# Altium PCB USB-C_BREAKOUT_PCB ASCII REV Project_PCB_Rev.Project_SCH_Rev.PcbDoc
Units mm, origin at the board's own origin, x right, y up, seen from the top; angles counter-clockwise.
Board outline 51.96 x 35 mm, 8 copper layers (Top, GND_1, Signal_1, GND_2, PWR, Signal_2, GND_3, Bottom), stack 1.6 mm thick; 18 components, 16 nets, 86 pads, 70 vias.
Unrouted connection lines stored in the file: 105.
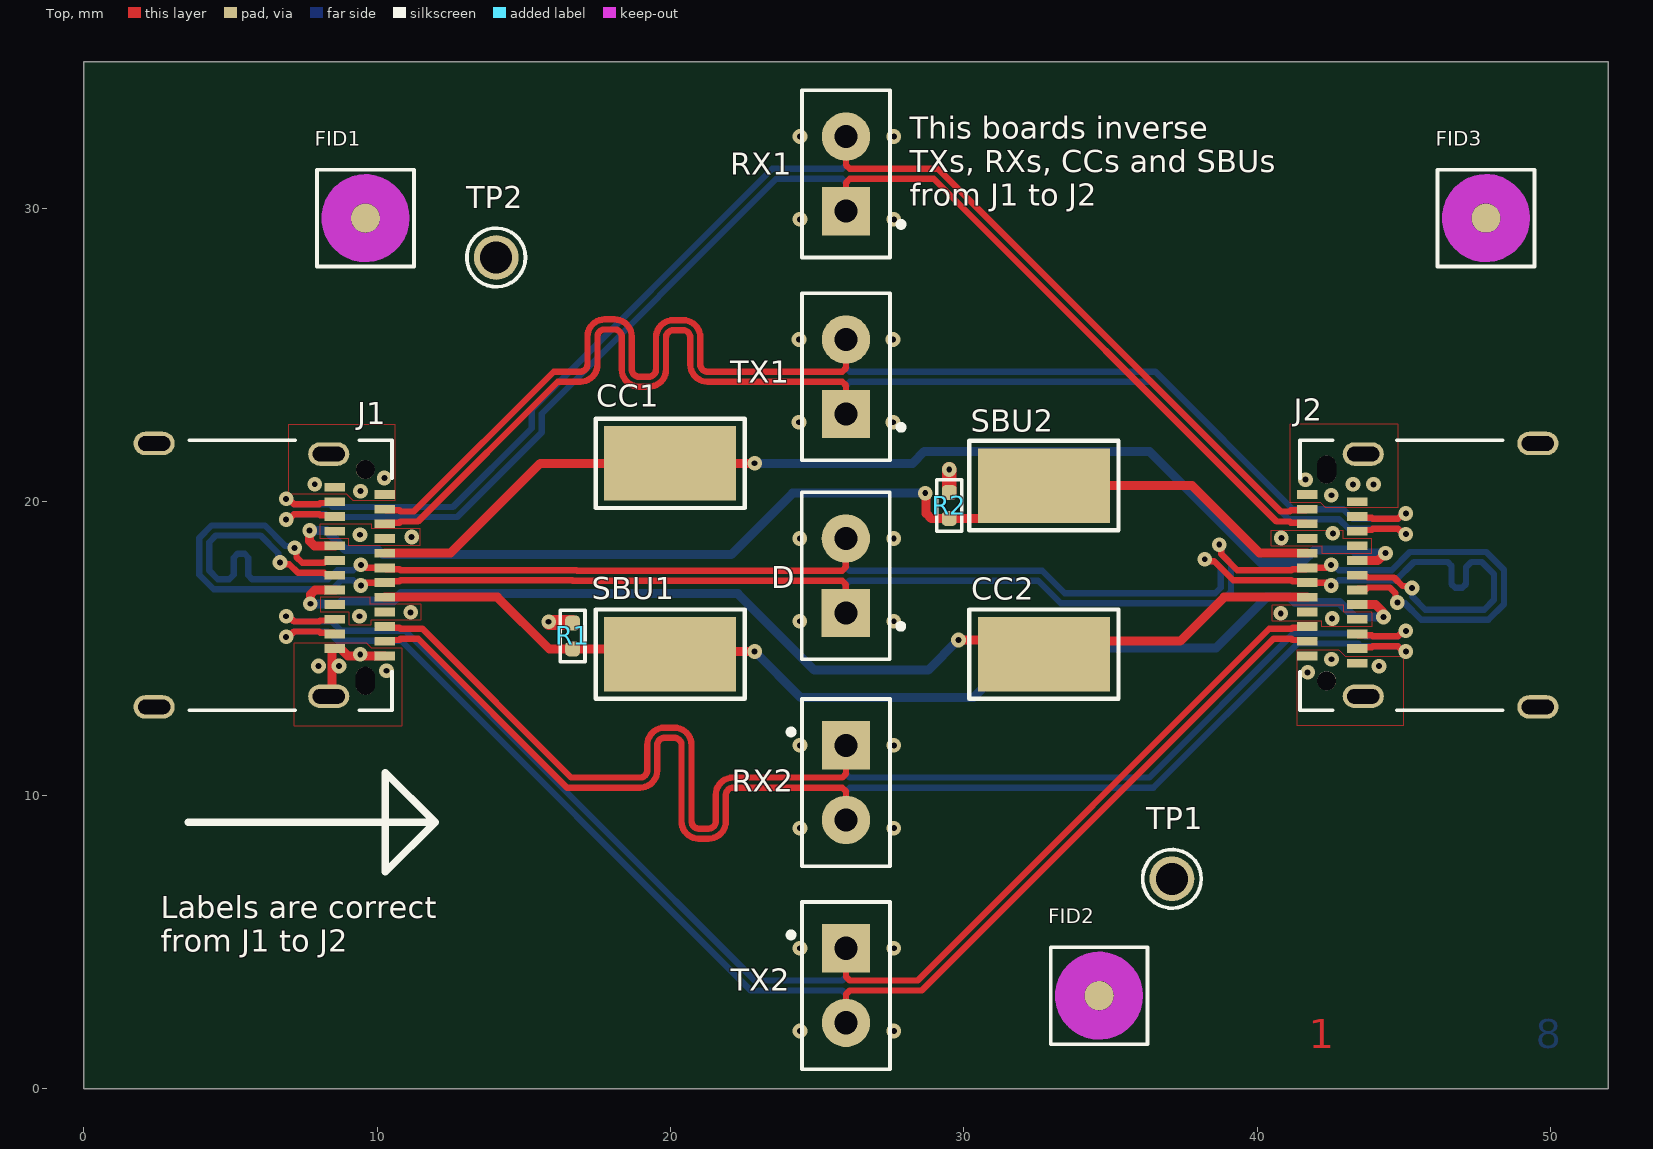
[diagram p0: Top view]
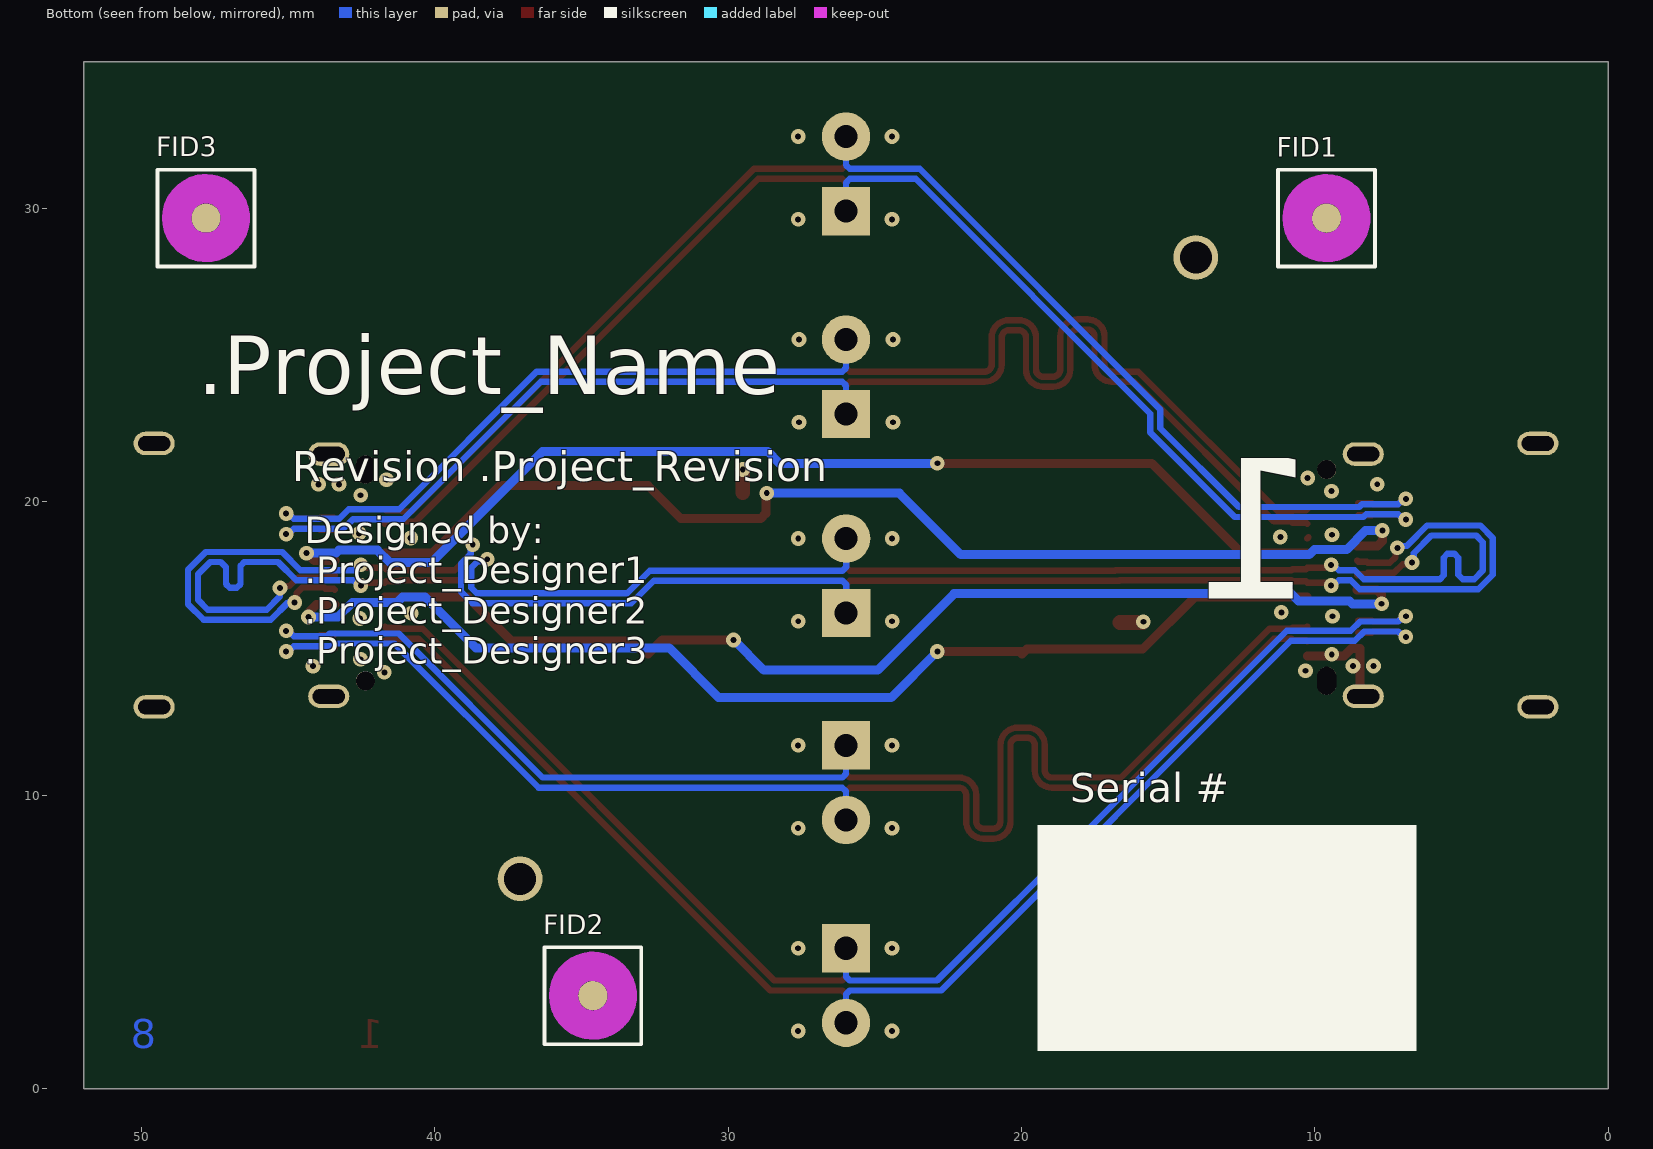
[diagram p1: Bottom view, seen from below]
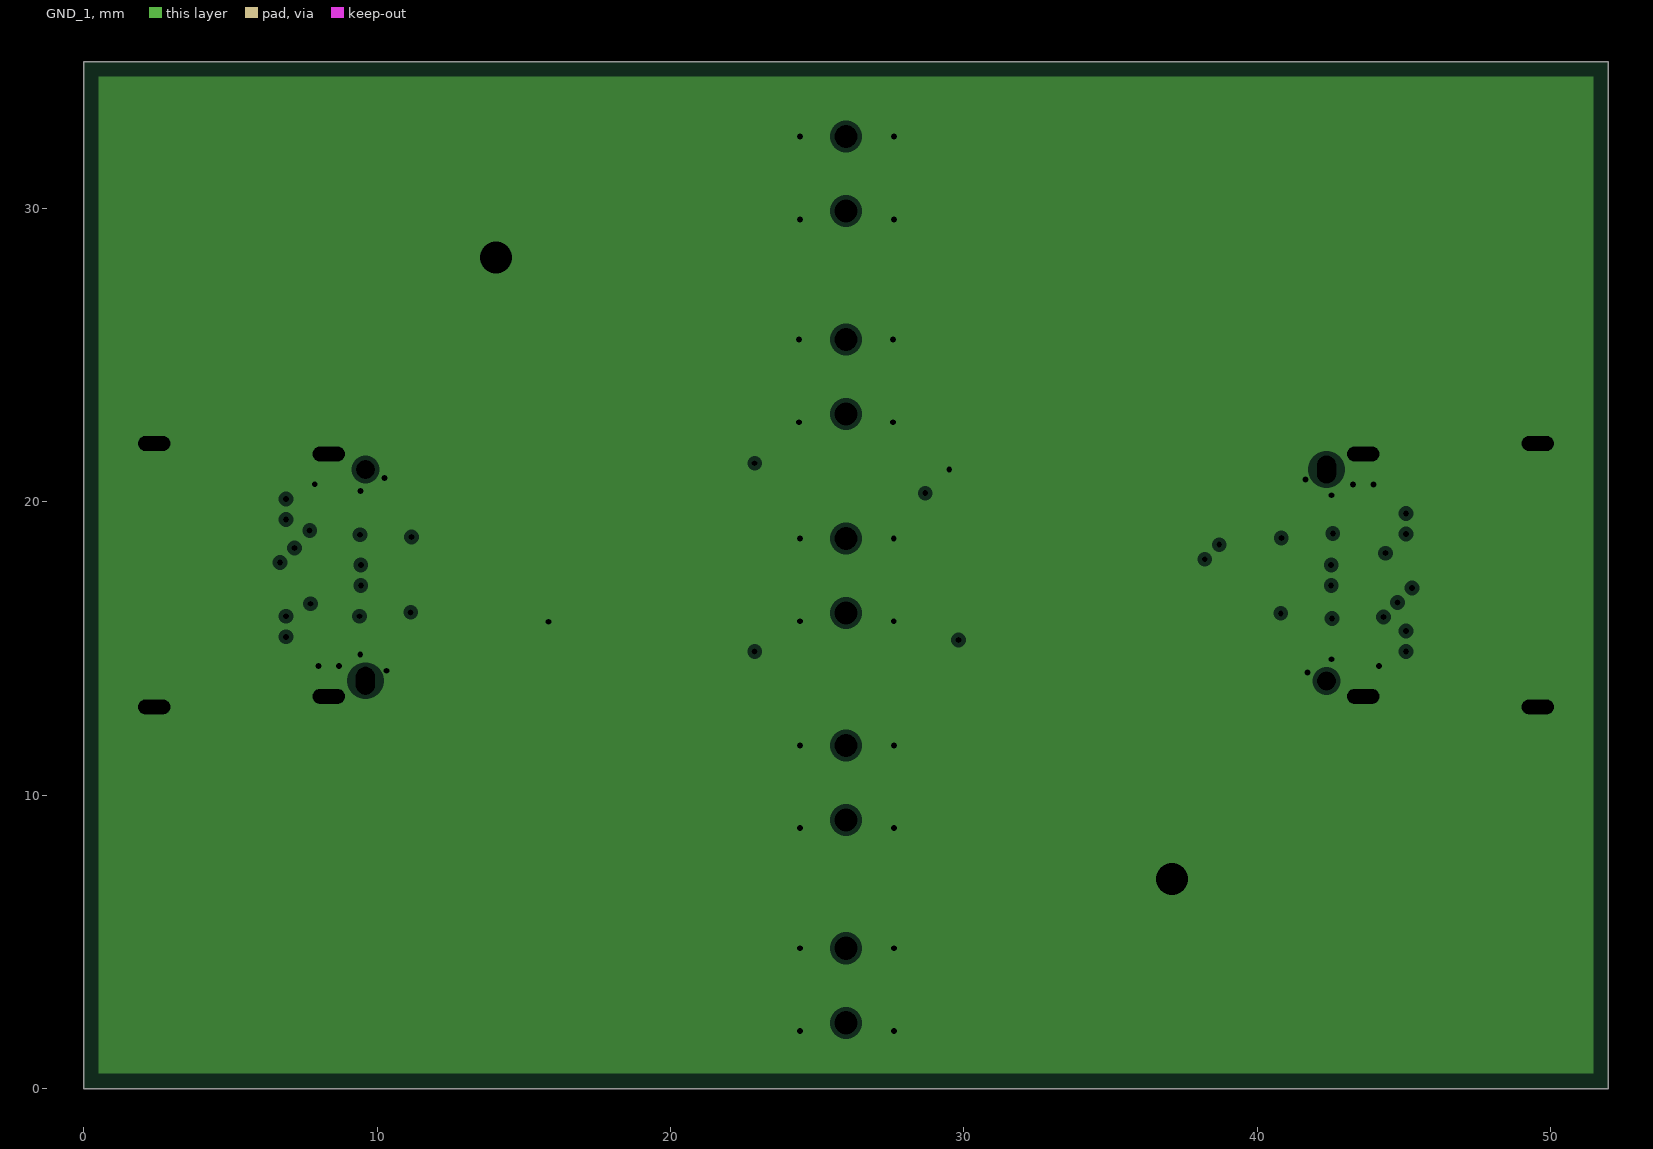
[diagram p2: GND_1, clearances drawn from the general rule]
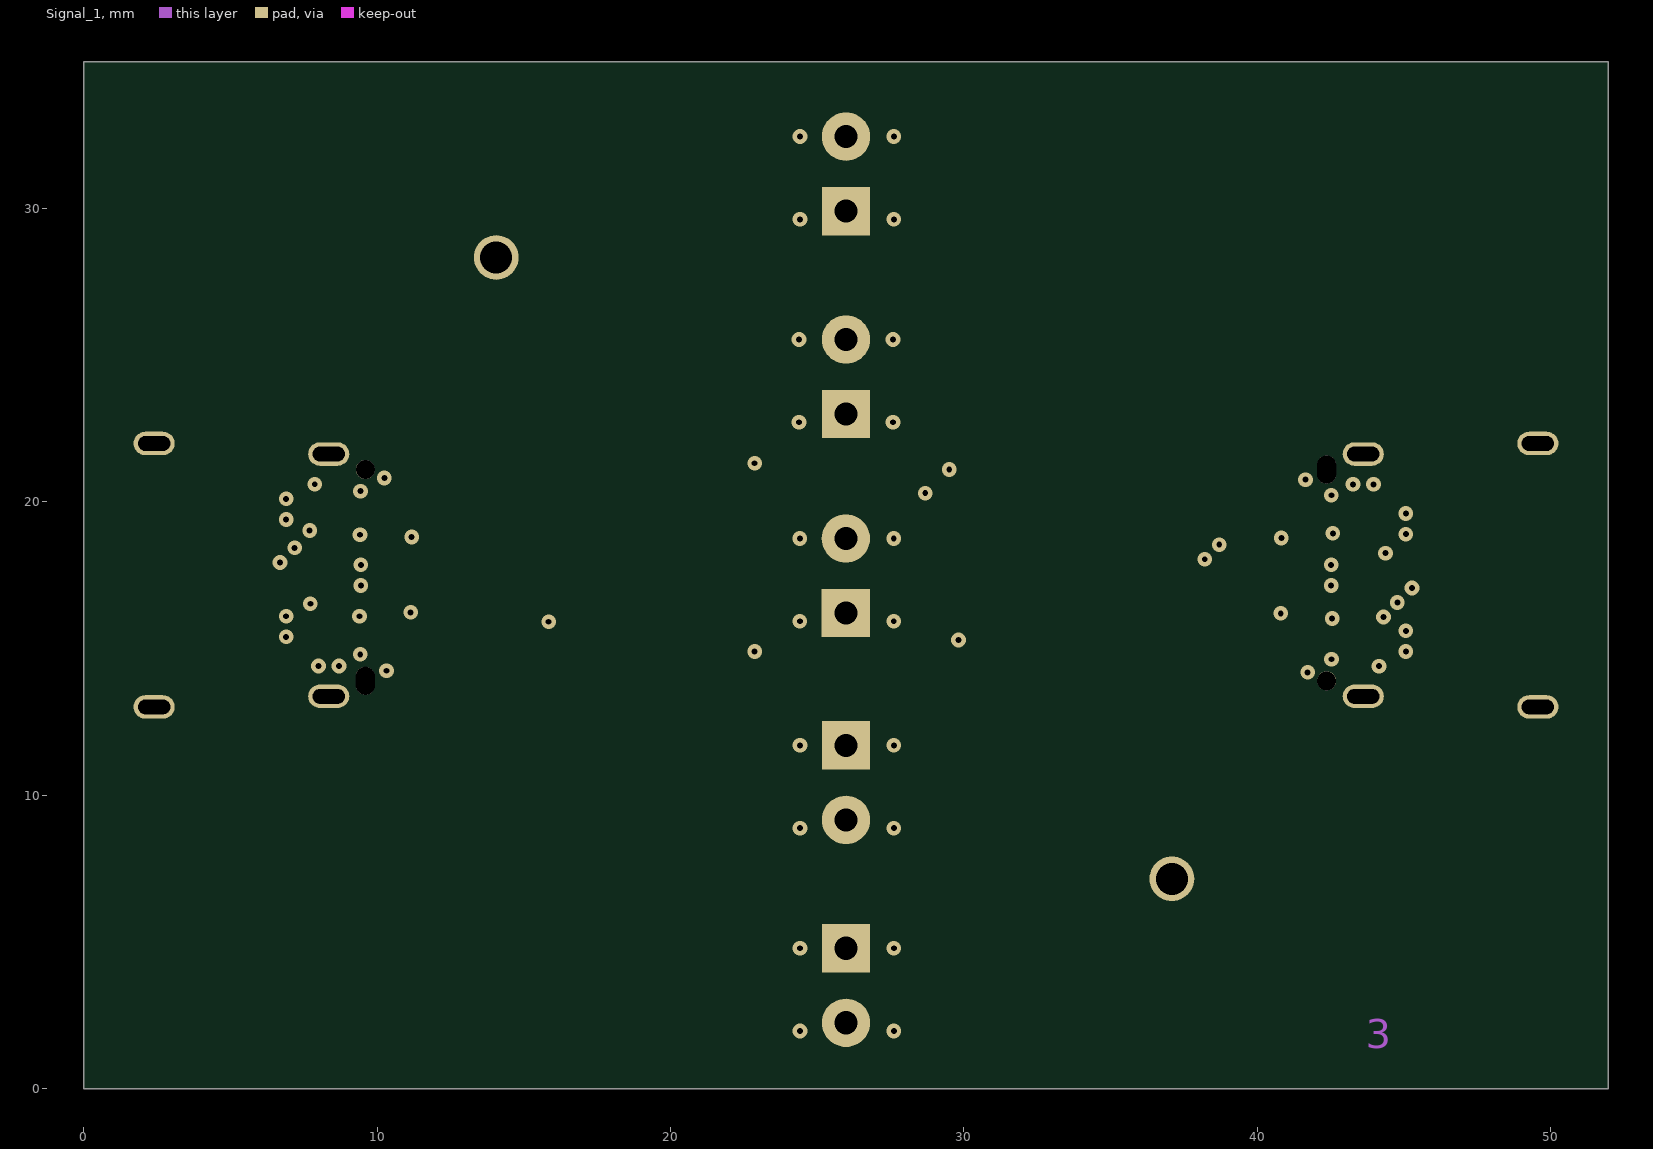
[diagram p3: Signal_1]
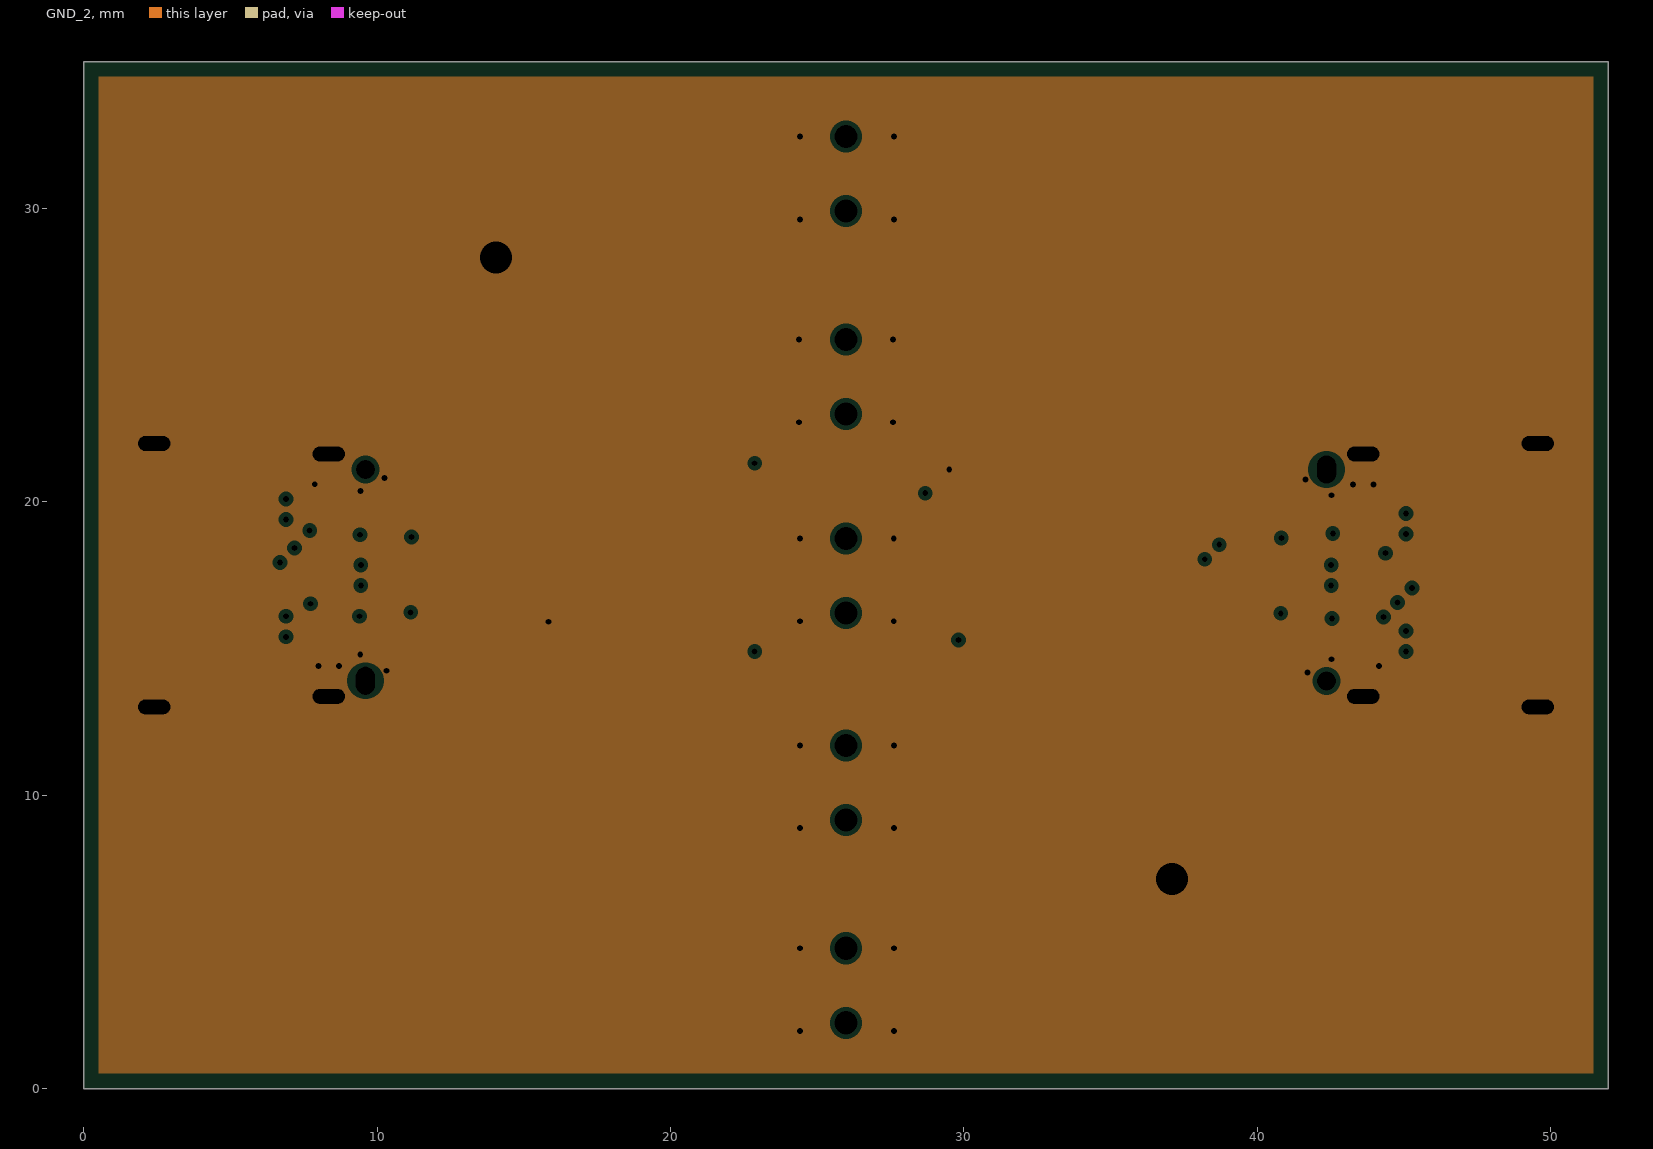
[diagram p4: GND_2, clearances drawn from the general rule]
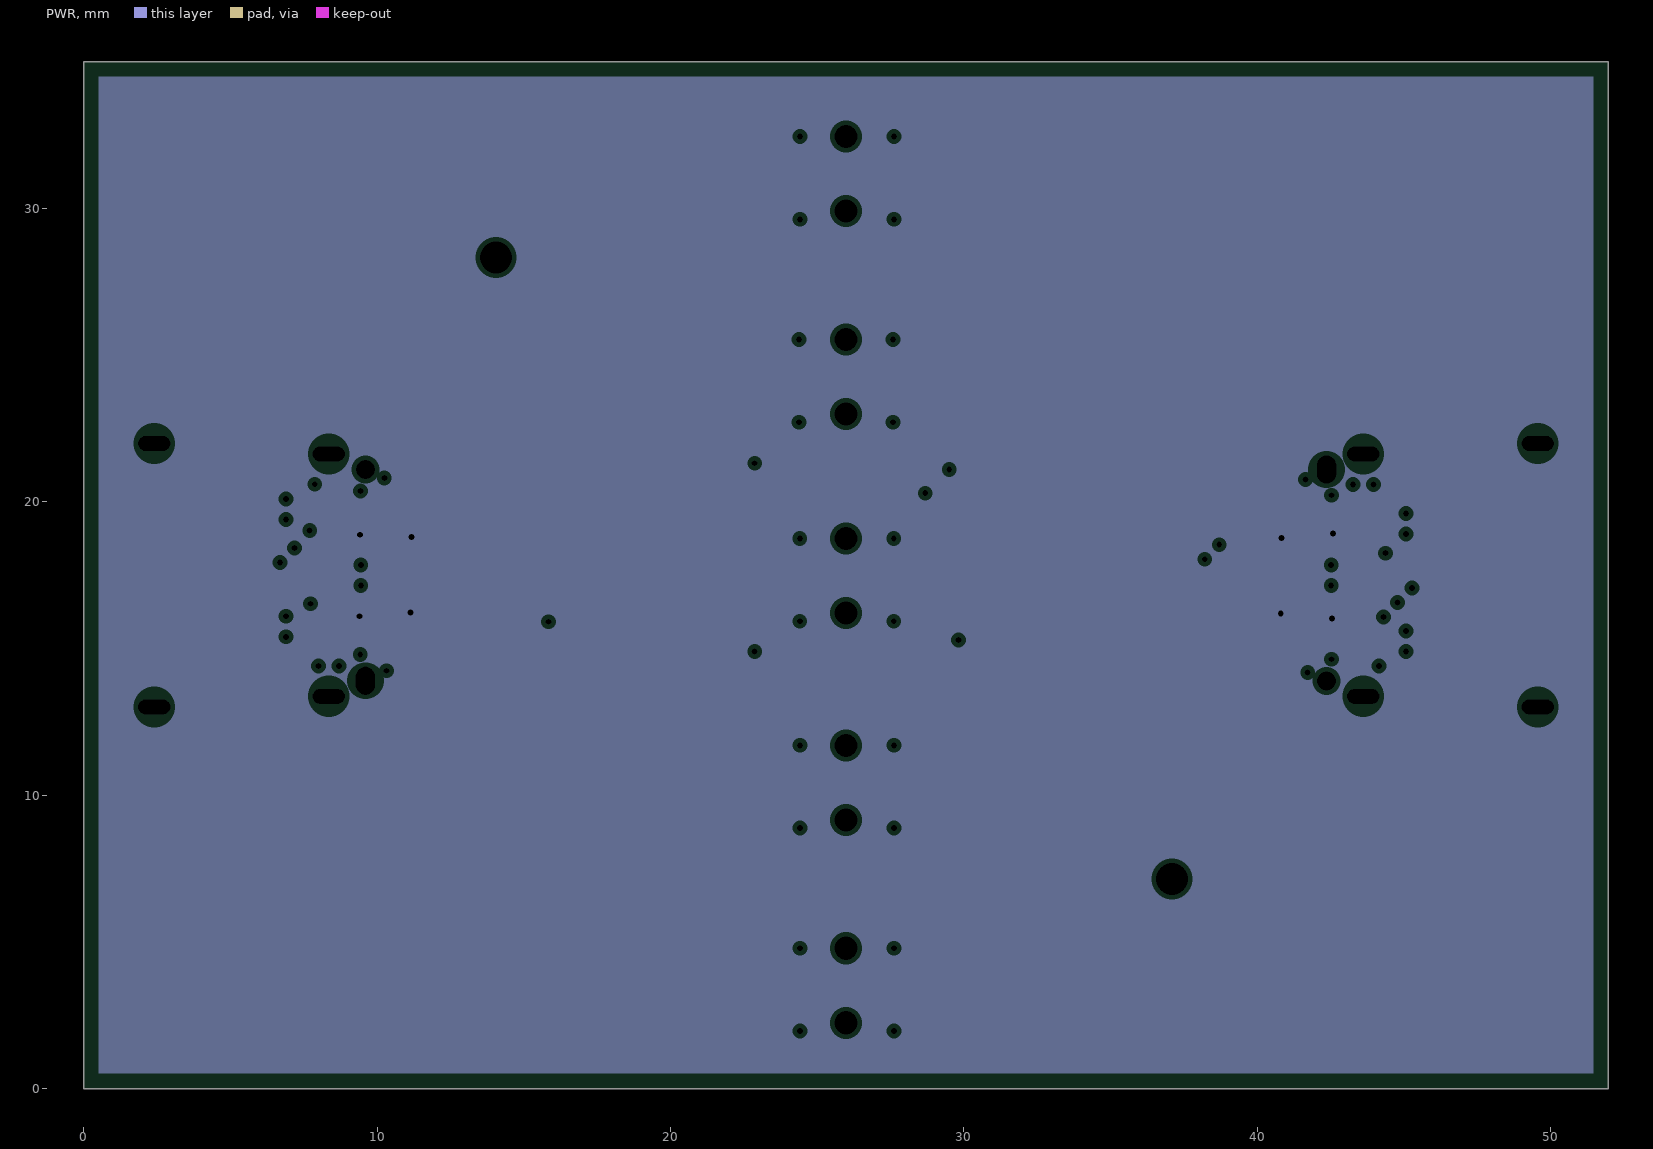
[diagram p5: PWR, clearances drawn from the general rule]
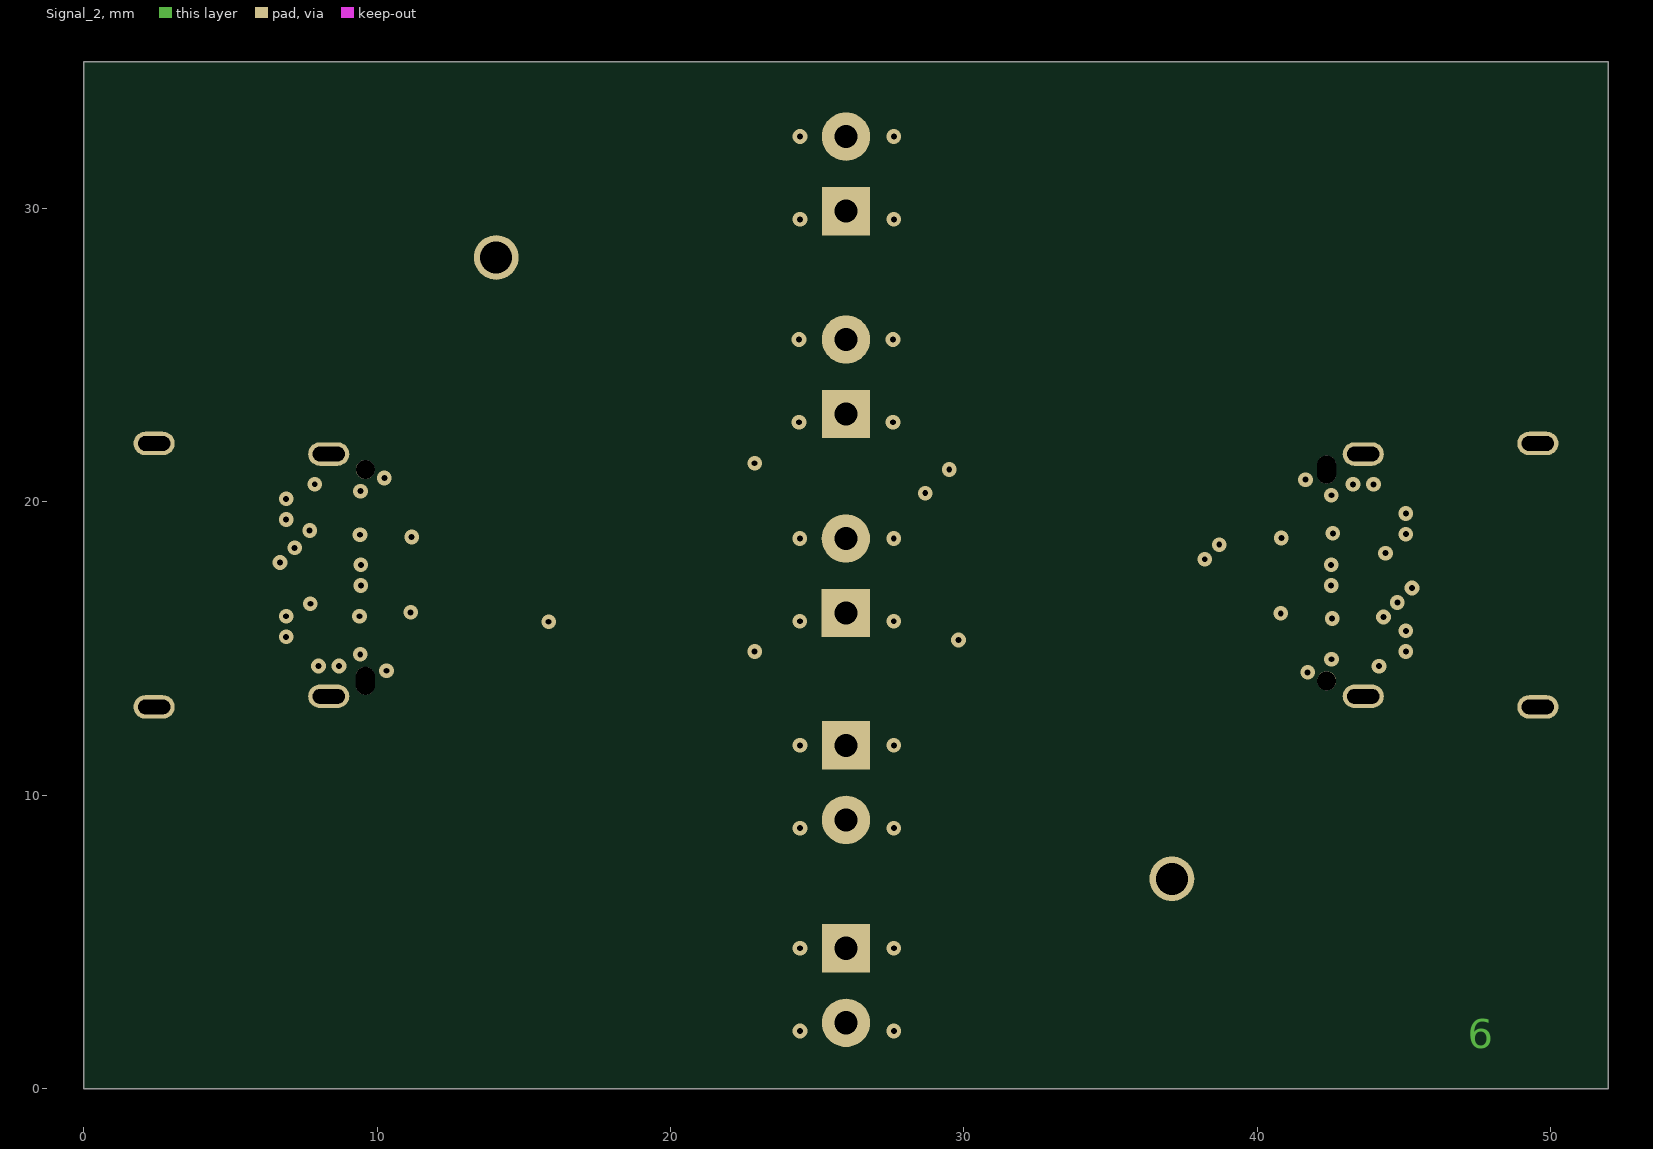
[diagram p6: Signal_2]
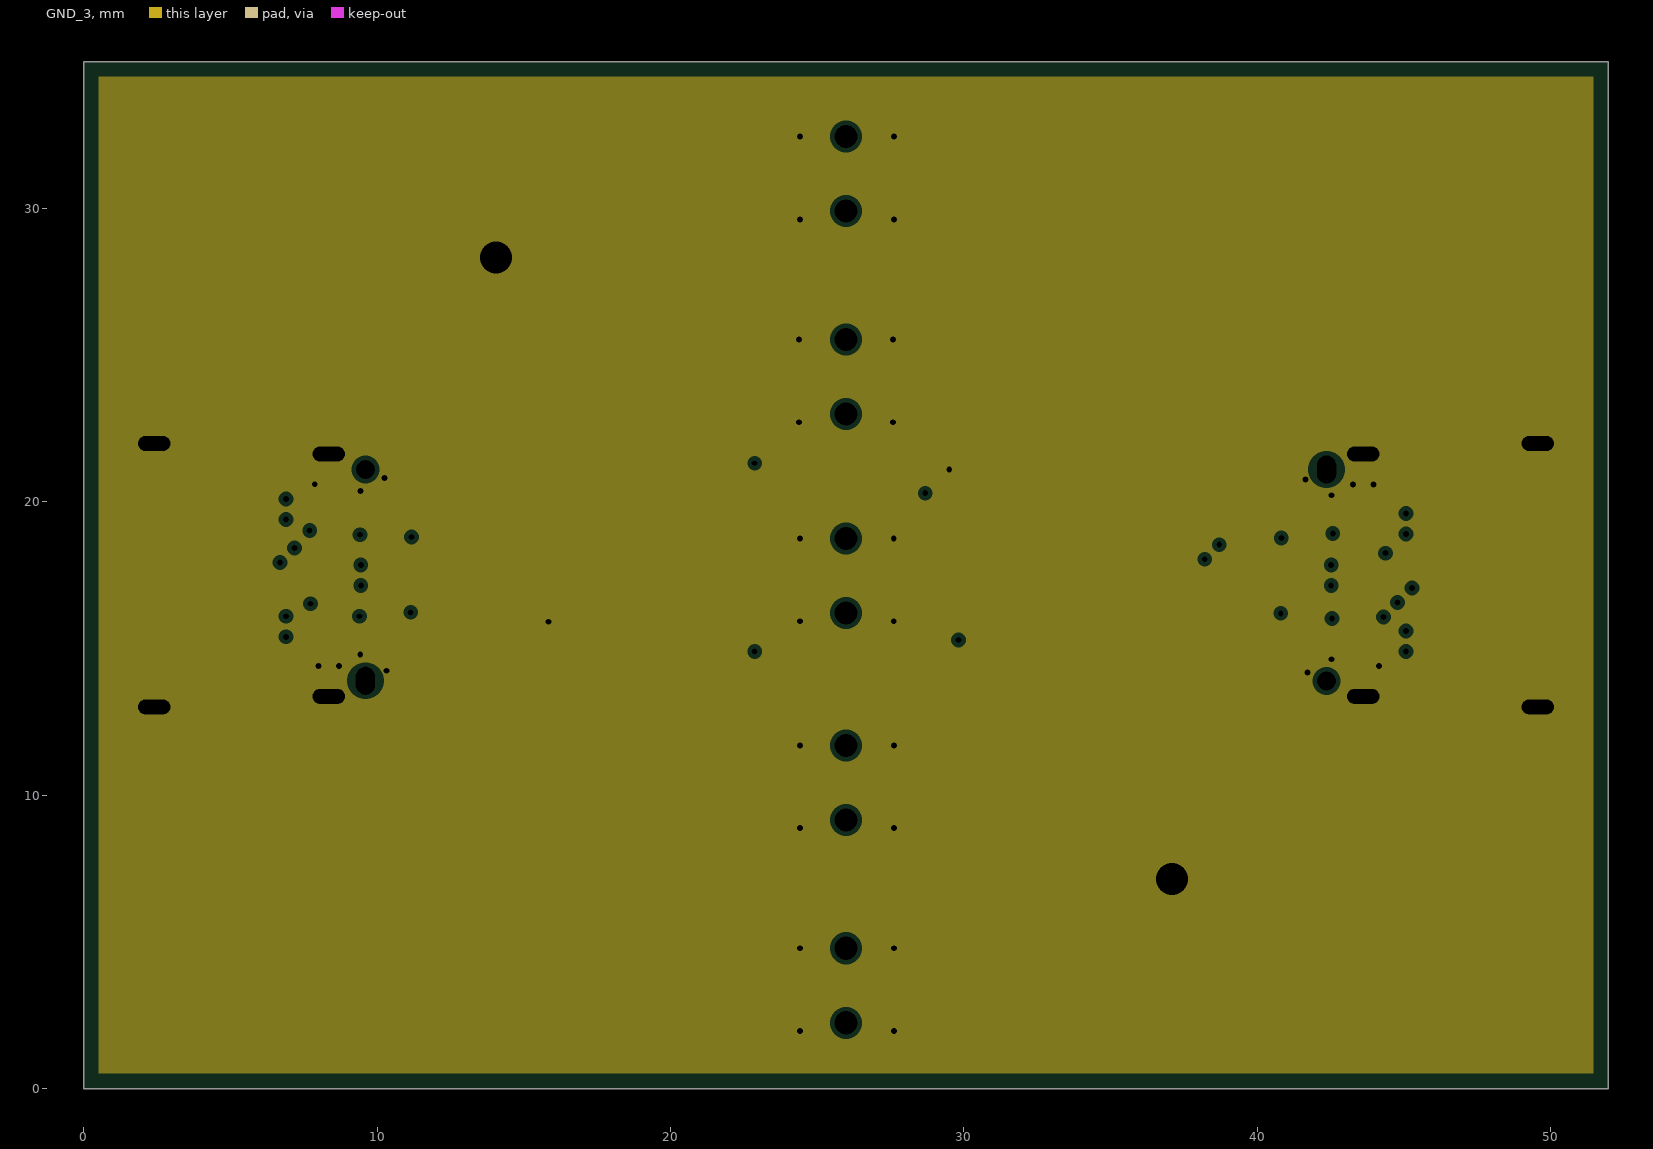
[diagram p7: GND_3, clearances drawn from the general rule]

## Layer stack, top to bottom
Top Solder: solder mask 0.0254, Solder Resist, Dk 4
Top: signal copper 0.035
Dielectric 1: prepreg 0.18, PP-006, Dk 4.29
GND_1: plane copper 0.035, net GND
Dielectric 2: core 0.2, Core-009, Dk 4.5
Signal_1: signal copper 0.035
Dielectric 3: prepreg 0.18, PP-006, Dk 4.29
GND_2: plane copper 0.035, net GND
Dielectric 4: core 0.2, Core-009, Dk 4.5
PWR: plane copper 0.035, net VBUS
Dielectric 5: prepreg 0.18, PP-006, Dk 4.29
Signal_2: signal copper 0.035
Dielectric 6: core 0.2, Core-009, Dk 4.5
GND_3: plane copper 0.035, net GND
Dielectric 7: prepreg 0.18, PP-006, Dk 4.29
Bottom: signal copper 0.035
Bottom Solder: solder mask 0.0152, Solder Resist, Dk 3.5

## Board outline
0,0 0,35 51.962,35 51.962,0

## Design rules (kind name [scope] priority, off if disabled: settings)
AssemblyTestPointUsage [All] p0: scope1count=1 scope1_0_kind=Board scope1_0_value=Board scope2count=1 scope2_0_kind=Board scope2_0_value=Board commentlength=0
AssemblyTestpoint [All] p0: scope1count=1 scope1_0_kind=Board scope1_0_value=Board scope2count=1 scope2_0_kind=Board scope2_0_value=Board commentlength=0
BoardOutlineClearance [All] p0: scope1count=1 scope1_0_kind=Board scope1_0_value=Board scope2count=1 scope2_0_kind=Board scope2_0_value=Board commentlength=0 gap=0.305
BoardOutlineClearance BoardOutlineClearance-MouseBites [All] p0: scope1count=1 scope1_0_kind=ComponentClass scope1_0_value=MouseBites scope2count=1 scope2_0_kind=Board scope2_0_value=Board commentlength=0 gap=0.254
BoardOutlineClearance BoardOutlineClearance-Fiducials [All] p0: scope1count=1 scope1_0_kind=ComponentClass scope1_0_value=Fiducials scope2count=1 scope2_0_kind=Board scope2_0_value=Board commentlength=0 gap=0
BoardOutlineClearance BoardOutlineClearance-Silk [All] p0 off: scope1count=1 scope1_0_kind=Board scope1_0_value=Board scope2count=1 scope2_0_kind=Board scope2_0_value=Board commentlength=94 gap=0 // Protel DXP Scope 1 Expression Was: (OnLayer('Bottom Overlay')) OR (OnLayer('Top Overlay'))
BoardOutlineClearance BoardOutlineClearance-Silk [(OnLayer('Bottom Overlay')) OR (OnLayer('Top Overlay'))] p1: gap=0 ignorepadtopadclearanceinfootprint=FALSE
BoardOutlineClearance BoardOutlineClearance-Fiducials [InComponentClass('Fiducials')] p2: gap=0 ignorepadtopadclearanceinfootprint=FALSE
BoardOutlineClearance BoardOutlineClearance-MouseBites [InComponentClass('MouseBites')] p3: gap=0.254 ignorepadtopadclearanceinfootprint=FALSE except(0: Arc-SplitContinuation Track-SplitContinuation SMDPad-SplitContinuation THPad-OutlineEdge THPad-CavityEdge THPad-CutoutEdge THPad-SplitBarrior THPad-SplitContinuation Via-SplitContinuation Fill-SplitContinuation Poly-SplitContinuation Region-OutlineEdge Region-CavityEdge Region-CutoutEdge Region-SplitBarrior Region-SplitContinuation Text-SplitContinuation; 0.508: Arc-OutlineEdge Track-OutlineEdge SMDPad-OutlineEdge Via-OutlineEdge Fill-OutlineEdge Poly-OutlineEdge Text-OutlineEdge)
BoardOutlineClearance [All] p4: gap=0.305 ignorepadtopadclearanceinfootprint=FALSE
Clearance Clearance_GEN [All] p0: scope1count=1 scope1_0_kind=Board scope1_0_value=Board scope2count=1 scope2_0_kind=Board scope2_0_value=Board commentlength=0 gap=0.102
Clearance Clearance_VIA [All] p0 off: scope1count=1 scope1_0_kind=Board scope1_0_value=Board scope2count=1 scope2_0_kind=Board scope2_0_value=Board commentlength=65 gap=0.31 // Protel DXP Scope 2 Expression Was: IsVia AND (InAnyComponent)
Clearance Clearance_VIA_SAME [All] p0 off: scope1count=1 scope1_0_kind=Board scope1_0_value=Board scope2count=1 scope2_0_kind=Board scope2_0_value=Board commentlength=69 gap=0.132 // Protel DXP Scope 2 Expression Was: IsVia and (NOT InAnyComponent)
Clearance Clearance_HOLE_2_PAD [All] p0 off: scope1count=1 scope1_0_kind=Board scope1_0_value=Board scope2count=1 scope2_0_kind=Board scope2_0_value=Board commentlength=70 gap=0 // Protel DXP Scope 2 Expression Was: IsSMTPin Or IsThruPin  or IsVia
Clearance Clearance_HOLE_2_PAD [IsVia and (NOT InAnyComponent) vs IsSMTPin Or IsThruPin  or IsVia] p1: gap=0 ignorepadtopadclearanceinfootprint=FALSE except(0.051: SMDPad-Via THPad-Via; 0.152: Via-Via)
Clearance Clearance_VIA_SAME [IsVia and (NOT InAnyComponent) vs IsVia and (NOT InAnyComponent)] p2: gap=0.132 ignorepadtopadclearanceinfootprint=FALSE
Clearance Clearance_VIA [IsVia AND (InAnyComponent) vs IsVia AND (InAnyComponent)] p3: gap=0.31 ignorepadtopadclearanceinfootprint=FALSE
Clearance Clearance_GEN [All] p4: gap=0.102 ignorepadtopadclearanceinfootprint=FALSE
ComponentClearance "Schematic Component Clearance Constraint_3" [All] p0: scope1count=1 scope1_0_kind=Component scope1_0_value=MB3 scope2count=1 scope2_0_kind=Board scope2_0_value=Board commentlength=0 gap=0 collisioncheckmode=3
ComponentClearance "Schematic Component Clearance Constraint_2" [All] p0: scope1count=1 scope1_0_kind=Component scope1_0_value=MB1 scope2count=1 scope2_0_kind=Board scope2_0_value=Board commentlength=0 gap=0 collisioncheckmode=3
ComponentClearance "Schematic Component Clearance Constraint_1" [All] p0: scope1count=1 scope1_0_kind=Component scope1_0_value=MB4 scope2count=1 scope2_0_kind=Board scope2_0_value=Board commentlength=0 gap=0 collisioncheckmode=3
ComponentClearance "Schematic Component Clearance Constraint" [All] p0: scope1count=1 scope1_0_kind=Component scope1_0_value=MB2 scope2count=1 scope2_0_kind=Board scope2_0_value=Board commentlength=0 gap=0 collisioncheckmode=3
ComponentClearance [All] p0: scope1count=1 scope1_0_kind=Board scope1_0_value=Board scope2count=1 scope2_0_kind=Board scope2_0_value=Board commentlength=0 gap=0.102 collisioncheckmode=3
ComponentClearance "Schematic Component Clearance Constraint_3" [InComponent('MB3')] p1: gap=0 collisioncheckmode=3 verticalgap=0 showdistances=FALSE
ComponentClearance "Schematic Component Clearance Constraint_2" [InComponent('MB1')] p2: gap=0 collisioncheckmode=3 verticalgap=0 showdistances=FALSE
ComponentClearance "Schematic Component Clearance Constraint_1" [InComponent('MB4')] p3: gap=0 collisioncheckmode=3 verticalgap=0 showdistances=FALSE
ComponentClearance "Schematic Component Clearance Constraint" [InComponent('MB2')] p4: gap=0 collisioncheckmode=3 verticalgap=0 showdistances=FALSE
ComponentClearance [All] p5: gap=0.102 collisioncheckmode=3 verticalgap=0.102 showdistances=FALSE
DiffPairsRouting DIFF_85_OHM [All] p0 off: scope1count=1 scope1_0_kind=Board scope1_0_value=Board scope2count=1 scope2_0_kind=Board scope2_0_value=Board commentlength=73 // Protel DXP Scope 1 Expression Was: InDifferentialPairClass('DIFF_85')
DiffPairsRouting DIFF_90_OHM [All] p0 off: scope1count=1 scope1_0_kind=Board scope1_0_value=Board scope2count=1 scope2_0_kind=Board scope2_0_value=Board commentlength=73 // Protel DXP Scope 1 Expression Was: InDifferentialPairClass('DIFF_90')
DiffPairsRouting DIFF_100_OHM [All] p0 off: scope1count=1 scope1_0_kind=Board scope1_0_value=Board scope2count=1 scope2_0_kind=Board scope2_0_value=Board commentlength=74 // Protel DXP Scope 1 Expression Was: InDifferentialPairClass('DIFF_100')
DiffPairsRouting DIFF_100_OHM [InDifferentialPairClass('DIFF_100')] p1: maxlimit=0.203 minlimit=0.127 mostfreqgap=0.203 toplayer_maxgap=0.127 toplayer_prefgap=0.127 toplayer_minwidth=0.127 toplayer_maxwidth=0.127 toplayer_prefwidth=0.127 midlayer1_mingap=0.203 midlayer1_minwidth=0.102 midlayer1_maxwidth=0.102 midlayer1_prefwidth=0.102 midlayer2_mingap=0.203 midlayer2_minwidth=0.102 midlayer2_maxwidth=0.102 midlayer2_prefwidth=0.102 bottomlayer_maxgap=0.127 bottomlayer_prefgap=0.127 bottomlayer_minwidth=0.127 bottomlayer_maxwidth=0.127 bottomlayer_prefwidth=0.127 maxuncoupledlength=12.7
DiffPairsRouting DIFF_90_OHM [InDifferentialPairClass('DIFF_90')] p2: maxlimit=0.178 minlimit=0.127 mostfreqgap=0.178 toplayer_maxgap=0.127 toplayer_prefgap=0.127 toplayer_minwidth=0.191 toplayer_maxwidth=0.191 toplayer_prefwidth=0.191 midlayer1_mingap=0.178 midlayer1_minwidth=0.127 midlayer1_maxwidth=0.127 midlayer1_prefwidth=0.127 midlayer2_mingap=0.178 midlayer2_minwidth=0.127 midlayer2_maxwidth=0.127 midlayer2_prefwidth=0.127 bottomlayer_maxgap=0.127 bottomlayer_prefgap=0.127 bottomlayer_minwidth=0.191 bottomlayer_maxwidth=0.191 bottomlayer_prefwidth=0.191 maxuncoupledlength=12.7
DiffPairsRouting DIFF_85_OHM [InDifferentialPairClass('DIFF_85')] p3: maxlimit=0.14 minlimit=0.127 mostfreqgap=0.14 toplayer_maxgap=0.127 toplayer_prefgap=0.127 toplayer_minwidth=0.216 toplayer_maxwidth=0.216 toplayer_prefwidth=0.216 midlayer1_mingap=0.14 midlayer1_minwidth=0.127 midlayer1_maxwidth=0.127 midlayer1_prefwidth=0.127 midlayer2_mingap=0.14 midlayer2_minwidth=0.127 midlayer2_maxwidth=0.127 midlayer2_prefwidth=0.127 bottomlayer_maxgap=0.127 bottomlayer_prefgap=0.127 bottomlayer_minwidth=0.216 bottomlayer_maxwidth=0.216 bottomlayer_prefwidth=0.216 maxuncoupledlength=12.7
FabricationTestPointUsage [All] p0: scope1count=1 scope1_0_kind=Board scope1_0_value=Board scope2count=1 scope2_0_kind=Board scope2_0_value=Board commentlength=0 valid=0 allowmultiple=FALSE
FabricationTestpoint [All] p0: scope1count=1 scope1_0_kind=Board scope1_0_value=Board scope2count=1 scope2_0_kind=Board scope2_0_value=Board commentlength=0 side=3 testpointundercomponent=TRUE minsize=1.016 maxsize=2.54 preferedsize=1.524 minholesize=0 maxholesize=1.016 preferedholesize=0.813 testpointgrid=0.025
FanoutControl Fanout_Default [All] p0: scope1count=1 scope1_0_kind=Board scope1_0_value=Board scope2count=1 scope2_0_kind=Board scope2_0_value=Board commentlength=30 // Fanout_Default (Default Rule)
FanoutControl Fanout_Small [All] p0 off: scope1count=1 scope1_0_kind=Board scope1_0_value=Board scope2count=1 scope2_0_kind=Board scope2_0_value=Board commentlength=84 // Protel DXP Scope 1 Expression Was: (CompPinCount < 5)   Fanout_Small (Default Rule)
FanoutControl Fanout_SOIC [All] p0 off: scope1count=1 scope1_0_kind=Board scope1_0_value=Board scope2count=1 scope2_0_kind=Board scope2_0_value=Board commentlength=71 // Protel DXP Scope 1 Expression Was: IsSOIC   Fanout_SOIC (Default Rule)
FanoutControl Fanout_LCC [All] p0 off: scope1count=1 scope1_0_kind=Board scope1_0_value=Board scope2count=1 scope2_0_kind=Board scope2_0_value=Board commentlength=69 // Protel DXP Scope 1 Expression Was: IsLCC   Fanout_LCC (Default Rule)
FanoutControl Fanout_BGA [All] p0 off: scope1count=1 scope1_0_kind=Board scope1_0_value=Board scope2count=1 scope2_0_kind=Board scope2_0_value=Board commentlength=69 // Protel DXP Scope 1 Expression Was: IsBGA   Fanout_BGA (Default Rule)
Height [All] p0: scope1count=1 scope1_0_kind=Board scope1_0_value=Board scope2count=1 scope2_0_kind=Board scope2_0_value=Board commentlength=0
HoleSize [All] p0: scope1count=1 scope1_0_kind=Board scope1_0_value=Board scope2count=1 scope2_0_kind=Board scope2_0_value=Board commentlength=0 absolutevalues=TRUE maxlimit=6.5 minlimit=0.2 maxpercent=80.000 minpercent=20.000
HoleSize [All] p1: absolutevalues=TRUE maxlimit=6.5 minlimit=0.2 maxpercent=80.000 minpercent=20.000
HoleToHoleClearance HoleToHoleClearance_Via [All] p0: scope1count=1 scope1_0_kind=Board scope1_0_value=Board scope2count=1 scope2_0_kind=Board scope2_0_value=Board commentlength=0
HoleToHoleClearance HoleToHoleClearance_Via [All] p1: gap=0.203 allowstackedmicrovias=TRUE
LayerPairs [All] p0: scope1count=1 scope1_0_kind=Board scope1_0_value=Board scope2count=1 scope2_0_kind=Board scope2_0_value=Board commentlength=0 enforce=TRUE
MatchedLengths [All] p0: scope1count=1 scope1_0_kind=NetClass scope1_0_value=DIFF scope2count=1 scope2_0_kind=Board scope2_0_value=Board commentlength=0 tolerance=0.025 amplitude=5.08 gap=0.508 style=90-Degree
MatchedLengths DiffMatching_WithinPair [All] p0 off: scope1count=1 scope1_0_kind=Board scope1_0_value=Board scope2count=1 scope2_0_kind=Board scope2_0_value=Board commentlength=88 tolerance=0.1 amplitude=5.08 gap=0.508 style=90-Degree // Protel DXP Scope 1 Expression Was: InDifferentialPairClass('All Differential Pairs')
MatchedLengths [InNetClass('DIFF')] p1: tolerance=0.025 checknetsindiffpair=FALSE checkdiffpairvsdiffpair=TRUE checkxsignals=TRUE checkothers=TRUE
MatchedLengths DiffMatching_WithinPair [InDifferentialPairClass('All Differential Pairs')] p2: tolerance=0.1 checknetsindiffpair=TRUE checkdiffpairvsdiffpair=FALSE checkxsignals=FALSE checkothers=FALSE
MinimumAnnularRing [All] p0: scope1count=1 scope1_0_kind=Board scope1_0_value=Board scope2count=1 scope2_0_kind=Board scope2_0_value=Board commentlength=0 minimumring=0.1
MinimumAnnularRing [All] p1: minimumring=0.1
MinimumSolderMaskSliver [All] p0: scope1count=1 scope1_0_kind=Board scope1_0_value=Board scope2count=1 scope2_0_kind=Board scope2_0_value=Board commentlength=0
MinimumSolderMaskSliver [All] p1: minsoldermaskwidth=0.1
NetAntennae [All] p0: scope1count=1 scope1_0_kind=Board scope1_0_value=Board scope2count=1 scope2_0_kind=Board scope2_0_value=Board commentlength=0
PasteMaskExpansion [All] p0: scope1count=1 scope1_0_kind=Board scope1_0_value=Board scope2count=1 scope2_0_kind=Board scope2_0_value=Board commentlength=0 expansion=-0.025
PasteMaskExpansion [All] p1: expansion=-0.025
PlaneClearance "Schematic Power Plane Clearance_3" [All] p0: scope1count=1 scope1_0_kind=Component scope1_0_value=MB3 scope2count=1 scope2_0_kind=Board scope2_0_value=Board commentlength=0 clearance=0.508
PlaneClearance "Schematic Power Plane Clearance_2" [All] p0: scope1count=1 scope1_0_kind=Component scope1_0_value=MB2 scope2count=1 scope2_0_kind=Board scope2_0_value=Board commentlength=0 clearance=0.508
PlaneClearance "Schematic Power Plane Clearance_1" [All] p0: scope1count=1 scope1_0_kind=Component scope1_0_value=MB4 scope2count=1 scope2_0_kind=Board scope2_0_value=Board commentlength=0 clearance=0.508
PlaneClearance "Schematic Power Plane Clearance" [All] p0: scope1count=1 scope1_0_kind=Component scope1_0_value=MB1 scope2count=1 scope2_0_kind=Board scope2_0_value=Board commentlength=0 clearance=0.508
PlaneClearance [All] p0: scope1count=1 scope1_0_kind=Board scope1_0_value=Board scope2count=1 scope2_0_kind=Board scope2_0_value=Board commentlength=0 clearance=0.152
PlaneClearance "Schematic Power Plane Clearance_3" [InComponent('MB3')] p1: clearance=0.508
PlaneClearance "Schematic Power Plane Clearance_2" [InComponent('MB2')] p2: clearance=0.508
PlaneClearance "Schematic Power Plane Clearance_1" [InComponent('MB4')] p3: clearance=0.508
PlaneClearance "Schematic Power Plane Clearance" [InComponent('MB1')] p4: clearance=0.508
PlaneClearance [All] p5: clearance=0.152
PlaneConnect [All] p0: scope1count=1 scope1_0_kind=Board scope1_0_value=Board scope2count=1 scope2_0_kind=Board scope2_0_value=Board commentlength=0 planeconnectstyle=Relief reliefexpansion=0.508 reliefentries=4 reliefconductorwidth=0.254 reliefairgap=0.254
PlaneConnect [All] p1: pad.planeconnectstyle=Relief pad.reliefexpansion=0.508 pad.reliefentries=4 pad.reliefconductorwidth=0.254 pad.reliefairgap=0.254 via.planeconnectstyle=Direct via.reliefexpansion=0.508 via.reliefentries=4 via.reliefconductorwidth=0.254 via.reliefairgap=0.254
PolygonConnect [All] p0: scope1count=1 scope1_0_kind=Board scope1_0_value=Board scope2count=1 scope2_0_kind=Board scope2_0_value=Board commentlength=0 connectstyle=Relief reliefconductorwidth=0.254 reliefentries=4 polygonreliefangle="90 Angle"
PolygonConnect [All] p1: thpad.connectstyle=Relief thpad.reliefconductorwidth=0.254 thpad.reliefentries=4 thpad.polygonreliefangle="90 Angle" thpad.airgapwidth=0.254 smdpad.connectstyle=Direct smdpad.reliefconductorwidth=0.254 smdpad.reliefentries=4 smdpad.polygonreliefangle="90 Angle" smdpad.airgapwidth=0.254 via.connectstyle=Direct via.reliefconductorwidth=0.254 via.reliefentries=4 via.polygonreliefangle="90 Angle" via.airgapwidth=0.254
RoutingCorners [All] p0: scope1count=1 scope1_0_kind=Board scope1_0_value=Board scope2count=1 scope2_0_kind=Board scope2_0_value=Board commentlength=0 cornerstyle=45-Degree minsetback=2.54 maxsetback=2.54
RoutingLayers [All] p0: scope1count=1 scope1_0_kind=Board scope1_0_value=Board scope2count=1 scope2_0_kind=Board scope2_0_value=Board commentlength=0 top layer=Automatic mid layer 1=Automatic mid layer 2=Automatic bottom layer=Automatic
RoutingPriority [All] p0: scope1count=1 scope1_0_kind=Board scope1_0_value=Board scope2count=1 scope2_0_kind=Board scope2_0_value=Board commentlength=0
RoutingTopology [All] p0: scope1count=1 scope1_0_kind=Board scope1_0_value=Board scope2count=1 scope2_0_kind=Board scope2_0_value=Board commentlength=0 topology=Shortest
RoutingVias [All] p0: scope1count=1 scope1_0_kind=Board scope1_0_value=Board scope2count=1 scope2_0_kind=Board scope2_0_value=Board commentlength=0 holewidth=0.25 width=0.55 viastyle="Through Hole" minholewidth=0.2 minwidth=0.5 maxholewidth=6.5 maxwidth=7.5
RoutingVias [All] p1: holewidth=0.25 width=0.55 viastyle="Through Hole" minholewidth=0.2 minwidth=0.5 maxholewidth=6.5 maxwidth=7.5
ShortCircuit [All] p0: scope1count=1 scope1_0_kind=Board scope1_0_value=Board scope2count=1 scope2_0_kind=Board scope2_0_value=Board commentlength=0 allowed=FALSE
SilkToBoardRegionClearance [All] p0: scope1count=1 scope1_0_kind=Board scope1_0_value=Board scope2count=1 scope2_0_kind=Board scope2_0_value=Board commentlength=0
SilkToSilkClearance [All] p0: scope1count=1 scope1_0_kind=Board scope1_0_value=Board scope2count=1 scope2_0_kind=Board scope2_0_value=Board commentlength=0
SilkToSilkClearance [All] p1: silktosilkclearance=0.025
SilkToSolderMaskClearance [All] p0 off: scope1count=1 scope1_0_kind=Board scope1_0_value=Board scope2count=1 scope2_0_kind=Board scope2_0_value=Board commentlength=44 // Protel DXP Scope 1 Expression Was: IsPad
SilkToSolderMaskClearance [IsPad] p1: minsilkscreentomaskgap=0.025 clearancetoexposedcopper=FALSE
SolderMaskExpansion [All] p0: scope1count=1 scope1_0_kind=Board scope1_0_value=Board scope2count=1 scope2_0_kind=Board scope2_0_value=Board commentlength=0 expansion=0.07
SolderMaskExpansion [All] p1: expansion=0.07 istentingtop=FALSE
UnRoutedNet [All] p0: scope1count=1 scope1_0_kind=Board scope1_0_value=Board scope2count=1 scope2_0_kind=Board scope2_0_value=Board commentlength=0
UnRoutedNet [All] p1: checkbadconnections=TRUE
UnpouredPolygon [All] p0: scope1count=1 scope1_0_kind=Board scope1_0_value=Board scope2count=1 scope2_0_kind=Board scope2_0_value=Board commentlength=0
Width [All] p0: scope1count=1 scope1_0_kind=Board scope1_0_value=Board scope2count=1 scope2_0_kind=Board scope2_0_value=Board commentlength=0 maxlimit=2.54 minlimit=0.102 preferedwidth=0.305
Width Width_50_OHM [All] p0: scope1count=1 scope1_0_kind=NetClass scope1_0_value=SE_50OHM scope2count=1 scope2_0_kind=Board scope2_0_value=Board commentlength=0 maxlimit=0.305 minlimit=0.152 preferedwidth=0.305
Width Width_50_OHM [InNetClass('SE_50OHM')] p1: maxlimit=0.305 minlimit=0.152 preferedwidth=0.305 toplayer_minwidth=0.305 midlayer1_maxwidth=0.152 midlayer1_prefwidth=0.152 midlayer2_maxwidth=0.152 midlayer2_prefwidth=0.152 bottomlayer_minwidth=0.305 minimp=50.000000 maximp=50.000000 favimp=50.000000
Width [All] p2: maxlimit=2.54 minlimit=0.102 preferedwidth=0.305 minimp=50.000000 maximp=50.000000 favimp=50.000000
19 further rules are at their usual default settings.

## Classes and differential pairs
component class USB-C_BREAKOUT_TITLE: FID1 FID2 FID3
net class DIFF_OTH: D_N D_P
net class DIFF: RX1_N RX1_P RX2_N RX2_P TX1_N TX1_P TX2_N TX2_P
component class TOP: CC1 CC2 D J1 J2 R1 R2 RX1 RX2 SBU1 SBU2 TP1 TP2 TX1 TX2
differential pair TX2: +TX2_P -TX2_N
differential pair TX1: +TX1_P -TX1_N
differential pair RX2: +RX2_P -RX2_N
differential pair RX1: +RX1_P -RX1_N
differential pair " ": +D_P -D_N

## Components (designator, comment, footprint, x,y, rotation, side; value= is the part's Value field where it differs from the comment)
CC1 "5019" TPO_SMD_5019 19.983,21.314 r0 top
CC2 "5019" TPO_SMD_5019 32.73,14.807 r0 top
D "TS-102-G-A" CON_HDR_TS-102-G-A 25.975,17.48 r90 top
FID1 "FID 1MM" FID_CIRCLE_1MM 9.603,29.67 r0 top
FID2 "FID 1MM" FID_CIRCLE_1MM 34.609,3.167 r0 top
FID3 "FID 1MM" FID_CIRCLE_1MM 47.796,29.672 r0 top
J1 "12401598E4#2A" CON_USB_3.2_TypeC_12401598E4#2A 9.6,17.5 r270 top
J2 "12401598E4#2A" CON_USB_3.2_TypeC_12401598E4#2A 42.362,17.5 r90 top
R1 "RC0402FR-0710KL" RES_0402 16.661,15.429 r90 top
R2 "RC0402FR-0710KL" RES_0402 29.5,19.876 r90 top
RX1 "TS-102-G-A" CON_HDR_TS-102-G-A 25.981,31.181 r90 top
RX2 "TS-102-G-A" CON_HDR_TS-102-G-A 25.981,10.43 r270 top
SBU1 "5019" TPO_SMD_5019 19.983,14.807 r0 top
SBU2 "5019" TPO_SMD_5019 32.73,20.552 r0 top
TP1 "100MIL" TPO_TH_ROUND_100MIL 37.09,7.151 r0 top
TP2 "100MIL" TPO_TH_ROUND_100MIL 14.057,28.331 r0 top
TX1 "TS-102-G-A" CON_HDR_TS-102-G-A 25.981,24.264 r90 top
TX2 "TS-102-G-A" CON_HDR_TS-102-G-A 25.981,3.513 r270 top

## Footprints (in the part's own frame and the unit in brackets; to place one, negate y for a bottom-side part, rotate by r counter-clockwise, add the part's x,y. Pads: shape width x height; smd on the part's side, far side on the other; paste and mask are expansions set on the pad)
CON_HDR_TS-102-G-A [mil]
  rect 65x65 hole 31: 1(-50,0)
  round 65 hole 31: 2(50,0)
  silkscreen extent -112,-76 112,59
CON_USB_3.2_TypeC_12401598E4#2A [mm]
  oval 0.8x1.4 hole 0.5 slot 1.1 at 90 deg paste+0 mask+0: 1(-4.13,-1.25) 2(-4.49,-7.2) 3(4.49,-7.2) 4(4.13,-1.25)
  rect 0.3x0.7 smd paste-0.025 mask+0: A1(-2.75,0.66) A2(-2.25,0.66) A3(-1.75,0.66) A4(-1.25,0.66) A5(-0.75,0.66) A6(-0.25,0.66) A7(0.25,0.66) A8(0.75,0.66) A9(1.25,0.66) A10(1.75,0.66) A11(2.25,0.66) A12(2.75,0.66) B1(2.5,-1.04) B2(2,-1.04) B3(1.5,-1.04) B4(1,-1.04) B5(0.5,-1.04) B6(0,-1.04) B7(-0.5,-1.04) B8(-1,-1.04) B9(-1.5,-1.04) B10(-2,-1.04) B11(-2.5,-1.04) B12(-3,-1.04)
  round 0.65 hole 0.65 unplated mask+0: ""(-3.6,0)
  oval 0.95x0.65 hole 0.65 slot 0.95 at 0 deg paste+0 mask+0: ""(3.6,0)
  silkscreen extent -4.6,-6 4.6,0.91
FID_CIRCLE_1MM [mm]
  round 1 smd paste-1 mask+0: 1(0,0)
  round 1 smd far side paste-1 mask+0: 2(0,0)
  Top keep-out circle w1: c0,0 r1
  Bottom keep-out circle w1: c0,0 r1
  silkscreen extent -1.65,-1.65 1.65,1.65
RES_0402 [mil] "Resistor - 0402"
  rrect60% 20x20 smd paste+0 mask+0: 1(-17.5,0) 2(17.5,0)
  silkscreen extent -34,-17 34,17
TPO_SMD_5019 [mm] "PC TEST POINT MINI SMD"
  rect 4.5x2.53 smd paste-5 mask+0: 1(0,0)
  silkscreen extent -2.54,-1.52 2.54,1.52
TPO_TH_ROUND_100MIL [mil]
  round 60 hole 42.91 mask+0: 1(0,0)
  silkscreen extent -39,-39 39,39

## Part data
CC1 CC2 SBU1 SBU2: library part TPO_SMD_5019, "TPO - PC TEST POINT MINI - SMD"
D RX1 RX2 TX1 TX2: library part CON_HDR_TS-102-G-A, "CON - HDR 2 position 0.100\" - TH"
FID1 FID2 FID3: library part FID_CIRCLE_1MM, "FID - FIDUCIAL 1MM CIRCLE DOUBLE-SIDED - 1MM"
J1 J2: library part CON_USB_3.2_TypeC_12401598E4#2A, "CON_USB - USB 3.2 Gen 2 (USB 3.1 Gen 2, Superspeed + (USB 3.1)) 24 pos Receptacle - R/A"
R1 R2: library part RES_RC0402FR-0710KL, "RES - 10K OHMS 1% 1/16W - 0402"
TP1 TP2: library part TPO_TH_ROUND_100MIL, "TPO - TEST POINT ROUND TH  - 100MIL"

## Via types
v1: diameter 0.5, hole 0.2, Top to Bottom, tented both sides, 70 vias

## Nets (pads, with @x,y where several pads share a name; then routed paths per layer and width w, separated by ;. In a path a pad name is that pad's centre, name@x,y a point inside that pad or via, vN(x,y) a via of type N, cw(c..) or ccw(c..) an arc to the next point about the centre after c; other vN are vias at no path point)
CC1: CC1.1 J1.A5 J2.B5 | length 38.4
  Top w0.305: J1.A5 12.498,18.25 15.562,21.314 CC1.1 v1(22.868,21.314) ; J2.B5 44.1,18 44.35,18.25 v1(44.369,18.25)
  Bottom w0.305: v1(22.868,21.314) 28.253,21.314 28.656,21.717 36.322,21.717 40.106,17.933 41.531,17.933 41.954,18.355 43.26,18.355 43.365,18.25 v1(44.369,18.25)
CC2: CC2.1 J1.B5 J2.A5 | length 37.8
  Top w0.305: v1(7.725,16.525) 7.725,16.839 7.886,17 J1.B5 ; v1(29.814,15.292) 32.244,15.292 CC2.1 33.173,15.25 37.371,15.25 38.871,16.75 J2.A5
  Bottom w0.305: v1(7.725,16.525) 8.719,16.525 8.82,16.626 10.564,16.626 10.808,16.87 22.298,16.87 24.905,14.262 28.784,14.262 v1(29.814,15.292)
D_N: D.1 J1.A7 J1.B7 J2.A7 J2.B7 | length 64.6
  Top w0.216: v1(7.187,18.431) 7.251,18.368 7.251,18.113 7.443,17.921 8.191,17.921 8.228,17.958 8.518,17.958 J1.B7 ; v1(9.444,17.149) 9.534,17.149 9.632,17.247 10.257,17.247 J1.A7 10.302,17.292 10.76,17.292 10.797,17.329 16.156,17.329 16.648,17.329 16.668,17.309 24.341,17.309 25.849,17.309 25.975,17.182 D.1 ; v1(38.706,18.54) 38.769,18.476 38.769,18.222 39.32,17.671 41.165,17.671 41.202,17.708 41.66,17.708 J2.A7 41.705,17.753 42.33,17.753 42.428,17.851 v1(42.518,17.851) ; J2.B7 43.444,17.042 43.734,17.042 43.771,17.079 44.519,17.079 44.711,16.887 44.711,16.632 v1(44.775,16.569)
  Bottom w0.216: v1(7.187,18.431) 7.123,18.495 6.869,18.495 6.853,18.512 6.169,19.196 4.361,19.196 3.934,18.768 3.934,17.519 4.428,17.024 8.474,17.024 8.779,17.329 9.187,17.329 9.367,17.149 v1(9.444,17.149) ; D.1 25.975,17.182 26.101,17.309 32.528,17.309 33.296,16.54 38.709,16.54 39.102,16.933 39.102,17.889 38.769,18.222 38.769,18.476 v1(38.706,18.54) ; v1(42.518,17.851) 42.595,17.851 42.775,17.671 44.581,17.671 45.202,18.292 47.799,18.292 48.409,17.682 48.409,16.514 47.878,15.984 45.584,15.984 44.999,16.569 v1(44.775,16.569)
D_P: D.2 J1.A6 J1.B6 J2.A6 J2.B6 | length 64.6
  Top w0.216: v1(6.691,17.935) 6.755,17.871 7.009,17.871 7.301,17.579 8.191,17.579 8.228,17.542 8.518,17.542 J1.B6 ; v1(9.444,17.851) 9.534,17.851 9.632,17.753 10.257,17.753 J1.A6 10.302,17.708 10.76,17.708 10.797,17.671 16.156,17.671 16.79,17.671 16.81,17.651 24.341,17.651 25.849,17.651 25.975,17.778 D.2 ; v1(38.209,18.043) 38.273,17.98 38.527,17.98 39.178,17.329 41.165,17.329 41.202,17.292 41.66,17.292 J2.A6 41.705,17.247 42.33,17.247 42.428,17.149 v1(42.518,17.149) ; J2.B6 43.444,17.458 43.734,17.458 43.771,17.421 44.661,17.421 44.953,17.129 45.207,17.129 v1(45.271,17.065)
  Bottom w0.216: v1(6.691,17.935) 6.627,17.999 6.627,18.253 6.027,18.853 4.503,18.853 4.276,18.626 4.276,17.661 4.571,17.367 4.961,17.367 5.112,17.517 5.112,18.099 5.238,18.225 5.483,18.225 5.61,18.099 5.61,17.493 5.736,17.367 8.332,17.367 8.637,17.671 9.187,17.671 9.367,17.851 v1(9.444,17.851) ; D.2 25.975,17.778 26.101,17.651 32.67,17.651 33.438,16.883 38.567,16.883 38.759,17.075 38.759,17.747 38.527,17.98 38.273,17.98 v1(38.209,18.043) ; v1(42.518,17.149) 42.595,17.149 42.775,17.329 44.723,17.329 45.344,17.949 46.491,17.949 46.617,17.822 46.617,17.201 46.744,17.075 46.989,17.075 47.116,17.201 47.116,17.766 47.299,17.949 47.657,17.949 48.066,17.54 48.066,16.656 47.736,16.327 45.726,16.327 45.271,16.781 v1(45.271,17.065)
GND: J1.1 J1.2 J1.3 J1.4 J1.A1 J1.A12 J1.B1 J1.B12 J2.1 J2.2 J2.3 J2.4 J2.A1 J2.A12 J2.B1 J2.B12 R1.2 R2.2 TP1.1 TP2.1 | length 5.1
  Top w0.305: J1.4 8.455,13.475 J1.B1@8.455,14.998 ; J1.B1 8.755,15 9.005,14.75 J1.A12 ; v1(15.845,15.915) v1@15.866,15.894 ; R1.2@16.64,15.894 R1.2
  Top w0.508: v1@15.866,15.894 R1.2@16.64,15.894 ; R2.2 v1(29.5,21.1)
  other v1: 24.413,1.962 27.613,1.962 24.413,4.783 27.613,4.783 24.413,8.879 27.613,8.879 24.413,11.7 27.613,11.7 41.717,14.186 10.321,14.243 7.998,14.404 8.702,14.404 44.15,14.4 42.53,14.635 9.425,14.8 24.407,15.928 27.607,15.928 24.407,18.75 27.607,18.75 42.525,20.225 9.432,20.365 7.875,20.6 43.26,20.596 43.964,20.596 41.641,20.757 10.245,20.814 24.381,22.712 27.581,22.712 24.381,25.534 27.581,25.534 24.413,29.629 27.613,29.629 24.413,32.451 27.613,32.451
RX1_N: J1.B10 J2.A10 RX1.1 | length 48.7
  Top w0.216: v1(6.896,19.399) 6.987,19.399 7.166,19.579 8.023,19.579 8.06,19.542 J1.B10@8.518,19.542 ; RX1.1 25.981,30.883 26.107,31.009 28.973,31.009 40.654,19.329 41.102,19.329 41.139,19.292 41.66,19.292 J2.A10
  Bottom w0.216: v1(6.896,19.399) 6.973,19.399 7.153,19.579 8.252,19.579 8.349,19.482 12.726,19.482 15.607,22.362 15.607,23.007 23.609,31.009 25.855,31.009 25.981,30.883 RX1.1
RX1_P: J1.B11 J2.A11 RX1.2 | length 48.7
  Top w0.216: v1(6.896,20.101) 6.987,20.101 7.166,19.921 8.023,19.921 8.06,19.958 J1.B11@8.518,19.958 ; RX1.2 25.981,31.479 26.107,31.352 29.115,31.352 40.796,19.671 41.102,19.671 41.139,19.708 41.66,19.708 J2.A11
  Bottom w0.216: v1(6.896,20.101) 6.973,20.101 7.153,19.921 8.394,19.921 8.491,19.825 12.584,19.825 15.264,22.505 15.264,23.149 23.467,31.352 25.855,31.352 25.981,31.479 RX1.2
RX2_N: J1.A10 J2.B10 RX2.1 | length 48.7
  Top w0.216: J1.A10 10.302,15.708 10.76,15.708 10.797,15.671 11.545,15.671 16.615,10.602 18.679,10.602 18.958,10.602 ccw(c18.958,10.849) 19.206,10.849 19.206,11.711 cw(c19.796,11.711) 19.796,12.302 20.127,12.302 cw(c20.127,11.711) 20.717,11.711 20.717,9.11 ccw(c20.965,9.11) 20.965,8.862 21.295,8.862 ccw(c21.295,9.11) 21.543,9.11 21.543,10.011 cw(c22.133,10.011) 22.133,10.602 23.828,10.602 25.855,10.602 25.981,10.728 RX2.1 ; J2.B10 43.444,15.458 43.902,15.458 43.939,15.421 44.796,15.421 44.975,15.601 v1(45.066,15.601)
  Bottom w0.216: RX2.1 25.981,10.728 26.107,10.602 36.318,10.602 41.228,15.512 43.583,15.512 43.674,15.421 44.809,15.421 44.989,15.601 v1(45.066,15.601)
RX2_P: J1.A11 J2.B11 RX2.2 | length 48.7
  Top w0.216: J1.A11 10.302,15.292 10.76,15.292 10.797,15.329 11.403,15.329 16.473,10.259 18.679,10.259 18.958,10.259 ccw(c18.958,10.849) 19.549,10.849 19.549,11.711 cw(c19.796,11.711) 19.796,11.959 20.127,11.959 cw(c20.127,11.711) 20.374,11.711 20.374,9.11 ccw(c20.965,9.11) 20.965,8.519 21.295,8.519 ccw(c21.295,9.11) 21.886,9.11 21.886,10.011 cw(c22.133,10.011) 22.133,10.259 23.828,10.259 25.856,10.259 25.983,10.132 25.983,9.162 RX2.2 ; J2.B11 43.444,15.042 43.902,15.042 43.939,15.079 44.796,15.079 44.975,14.899 v1(45.066,14.899)
  Bottom w0.216: RX2.2 25.981,10.132 26.107,10.259 36.46,10.259 41.37,15.169 43.441,15.169 43.532,15.079 44.809,15.079 44.989,14.899 v1(45.066,14.899)
SBU1: J1.A8 J2.B8 R1.1 SBU1.1 | length 38.4
  Top w0.305: J1.A8 14.099,16.75 15.865,14.984 R1.1 19.806,14.984 SBU1.1@19.892,14.899 ; SBU1.1 SBU1.1@19.892,14.899 ; v1(22.868,14.899) SBU1.1@19.892,14.899 ; J2.B8 44.031,16.5 44.263,16.269 44.263,16.112 v1(44.3,16.075)
  Bottom w0.305: v1(22.868,14.899) 24.438,13.328 30.322,13.328 32.013,15.019 38.598,15.019 40.329,16.75 41.102,16.75 41.277,16.575 42.8,16.575 43.3,16.075 v1(44.3,16.075)
SBU2: J1.B8 J2.A8 R2.1 SBU2.1 | length 38.7
  Top w0.305: v1(7.7,19.025) 7.7,18.662 7.862,18.5 J1.B8 ; v1(28.68,20.296) 28.715,20.262 28.715,19.608 28.893,19.43 29.398,19.43 29.4,19.432 R2.1 31.609,19.432 SBU2.1 37.778,20.552 40.08,18.25 J2.A8
  Bottom w0.305: v1(7.7,19.025) 8.268,19.025 8.919,18.373 10.018,18.373 10.192,18.2 22.064,18.2 24.16,20.296 v1(28.68,20.296)
TX1_N: J1.A3 J2.B3 TX1.1 | length 48.7
  Top w0.216: J1.A3 10.302,19.292 10.76,19.292 10.797,19.329 11.392,19.329 16.156,24.092 16.64,24.092 16.92,24.092 ccw(c16.92,24.683) 17.51,24.683 17.51,25.629 cw(c17.758,25.629) 17.758,25.876 18.088,25.876 cw(c18.088,25.629) 18.336,25.629 18.336,24.513 ccw(c18.926,24.513) 18.926,23.923 19.257,23.923 ccw(c19.257,24.513) 19.847,24.513 19.847,25.602 cw(c20.095,25.602) 20.095,25.85 20.425,25.85 cw(c20.425,25.602) 20.673,25.602 20.673,24.683 ccw(c21.263,24.683) 21.263,24.092 23.805,24.092 25.855,24.092 25.981,23.966 TX1.1 ; J2.B3@43.444,19.042 43.902,19.042 43.939,19.079 44.796,19.079 44.975,18.899 v1(45.066,18.899)
  Bottom w0.216: TX1.1 25.981,23.966 26.107,24.092 36.387,24.092 41.072,19.407 42.784,19.407 43.112,19.079 44.809,19.079 44.989,18.899 v1(45.066,18.899)
TX1_P: J1.A2 J2.B2 TX1.2 | length 48.7
  Top w0.216: J1.A2 10.302,19.708 10.76,19.708 10.797,19.671 11.25,19.671 16.014,24.435 16.64,24.435 16.92,24.435 ccw(c16.92,24.683) 17.167,24.683 17.167,25.629 cw(c17.758,25.629) 17.758,26.219 18.088,26.219 cw(c18.088,25.629) 18.679,25.629 18.679,24.513 ccw(c18.926,24.513) 18.926,24.266 19.257,24.266 ccw(c19.257,24.513) 19.504,24.513 19.504,25.602 cw(c20.095,25.602) 20.095,26.193 20.425,26.193 cw(c20.425,25.602) 21.016,25.602 21.016,24.683 ccw(c21.263,24.683) 21.263,24.435 23.805,24.435 25.855,24.435 25.981,24.562 TX1.2 ; J2.B2@43.444,19.458 43.902,19.458 43.939,19.421 44.796,19.421 44.975,19.601 v1(45.066,19.601)
  Bottom w0.216: TX1.2 25.981,24.562 26.107,24.435 36.529,24.435 41.214,19.75 42.926,19.75 43.254,19.421 44.809,19.421 44.989,19.601 v1(45.066,19.601)
TX2_N: J1.B3 J2.A3 TX2.1 | length 48.7
  Top w0.216: v1(6.896,16.101) 6.987,16.101 7.166,15.921 8.023,15.921 8.06,15.958 J1.B3@8.518,15.958 ; TX2.1 25.981,3.811 26.107,3.685 28.425,3.685 40.412,15.671 41.165,15.671 41.202,15.708 41.66,15.708 J2.A3
  Bottom w0.216: v1(6.896,16.101) 6.973,16.101 7.153,15.921 8.458,15.921 8.777,15.602 10.963,15.602 17.418,9.148 22.881,3.685 25.855,3.685 25.981,3.811 TX2.1
TX2_P: J1.B2 J2.A2 TX2.2 | length 48.7
  Top w0.216: v1(6.896,15.399) 6.987,15.399 7.166,15.579 8.023,15.579 8.06,15.542 J1.B2@8.518,15.542 ; TX2.2 25.981,3.215 26.107,3.342 28.567,3.342 40.554,15.329 41.165,15.329 41.202,15.292 41.66,15.292 J2.A2
  Bottom w0.216: v1(6.896,15.399) 6.973,15.399 7.153,15.579 8.316,15.579 8.635,15.26 10.821,15.26 22.739,3.342 25.855,3.342 25.981,3.215 TX2.2
VBUS: J1.A4 J1.A9 J1.B4 J1.B9 J2.A4 J2.A9 J2.B4 J2.B9 | length 0.1
  Top w0.216: J1.A4@10.218,18.792 J1.A4
  other v1: 42.55,16.025 9.4,16.1 40.8,16.2 11.143,16.234 40.819,18.766 11.175,18.8 9.416,18.877 42.575,18.925
pads on no net: FID1.1 FID1.2 FID2.1 FID2.2 FID3.1 FID3.2 J1. J2.

## Polygon pours and split planes (outlines as drawn)
VBUS on Top "NONET_L-01_P-001" (solid, pour order 14): 9.025,18.5 9.025,18.75 8.06,18.75 8.06,19.25 9.803,19.25 9.803,19.099 11.455,19.099 11.455,18.5
VBUS on Top "NONET_L-01_P-001" (solid, pour order 13): 9.025,16.75 8.06,16.75 8.06,16.25 9.025,16.25 9.025,15.815 9.801,15.815 9.801,15.98 11.507,15.98 11.507,16.503 9.762,16.503 9.762,16.75
VBUS on Top "NONET_L-01_P-001" (solid, pour order 12): 42.937,16.5 42.937,16.25 43.902,16.25 43.902,15.75 42.2,15.75 42.2,15.925 40.507,15.925 40.507,16.5
VBUS on Top "NONET_L-01_P-001" (solid, pour order 11): 42.937,18.25 43.902,18.25 43.902,18.75 42.937,18.75 42.937,19.02 40.455,19.02 40.455,18.497 42.2,18.497 42.2,18.25
GND on Top "NONET_L-01_P-001" (solid, pour order 8): 41.355,14.958 42.785,14.965 43.006,14.745 44.975,14.745 44.975,12.36 41.355,12.36
GND on Top "NONET_L-01_P-001" (solid, pour order 7): 41.102,22.64 41.102,19.987 42.143,19.987 42.313,19.816 44.809,19.816 44.809,22.64
GND on Top "NONET_L-01_P-001" (solid, pour order 1): 10.86,12.36 10.86,15.013 9.819,15.013 9.649,15.184 7.153,15.184 7.153,12.36
GND on Top "NONET_L-01_P-001" (solid, pour order 2): 10.607,20.042 9.177,20.035 8.956,20.255 6.987,20.255 6.987,22.64 10.607,22.64
GND on GND_1 (split plane): 51.452,0.51 0.51,0.51 0.51,34.49 51.452,34.49
GND on GND_2 (split plane): 51.452,0.51 0.51,0.51 0.51,34.49 51.452,34.49
VBUS on PWR (split plane): 51.452,0.51 0.51,0.51 0.51,34.49 51.452,34.49
GND on GND_3 (split plane): 51.452,0.51 0.51,0.51 0.51,34.49 51.452,34.49

## Other copper
Top:
  text "1" at 41.746,1.382 h1
Signal_1:
  text "3" at 43.691,1.382 h1
Signal_2:
  text "6" at 47.168,1.382 h1
Bottom:
  text "8" at 49.486,1.382 h1
GND_1 (plane layer: these items are gaps in the copper):
  the board outline again, w1.016
  text "2" at 42.532,1.382 h1
GND_2 (plane layer: these items are gaps in the copper):
  the board outline again, w1.016
  text "4" at 44.829,1.382 h1
PWR (plane layer: these items are gaps in the copper):
  the board outline again, w1.016
  text "5" at 46.009,1.382 h1
GND_3 (plane layer: these items are gaps in the copper):
  the board outline again, w1.016
  text "7" at 48.344,1.382 h1

## Silkscreen, mask and mechanical layers (free items; w line width, h text height)
Top Overlay:
  lines w0.254: 3.553,9.078 11.973,9.078 ; 11.791,9.261 11.973,9.078 ; 11.973,9.078 10.278,7.383 10.278,10.773 11.973,9.078
  text "This boards inverse / TXs, RXs, CCs and SBUs  / from J1 to J2" at 28.155,30.088 h0.76
  text "Labels are correct / from J1 to J2" at 2.626,4.665 h0.76
Bottom Overlay:
  rectangle: 6.538,1.275 19.456,8.978
  text ".Project_Name" at 48.07,23.673 h2
  text "Revision .Project_Revision" at 44.848,20.707 h1.02
  text "1" at 9.9,14.805 h10
  text "Designed by: / .Project_Designer1 / .Project_Designer2 / .Project_Designer3" at 44.432,14.48 h0.91
  text "Serial #" at 18.342,9.764 h1
Board Outline:
  the board outline again, w0.254
Route Tool Path:
  lines w2.54: 0,-1.27 cw(c0,0) -1.27,0 ccw(c0,0) 0,-1.27 ; 0,-1.27 51.962,-1.27 ; 0,36.27 ccw(c0,35) -1.27,35 cw(c0,35) 0,36.27 ; 0,36.27 51.962,36.27 ; 51.962,-1.27 ccw(c51.962,0) 53.232,0 cw(c51.962,0) 51.962,-1.27 ; 51.962,36.27 cw(c51.962,35) 53.232,35 ccw(c51.962,35) 51.962,36.27

## Text inside footprints (layer, text, board x,y; h text height)
J1: Top Assembly "A1" at 9.727,21.564 h0.51 r270; Top Assembly "B12" at 7.432,21.67 h0.51 r270; Top Assembly "B1" at 7.315,14.452 h0.51 r270; Top Assembly "A12" at 9.727,14.579 h0.51 r270
J2: Top Assembly "A1" at 42.235,13.436 h0.51 r90; Top Assembly "B12" at 44.53,13.33 h0.51 r90; Top Assembly "B1" at 44.647,20.548 h0.51 r90; Top Assembly "A12" at 42.235,20.421 h0.51 r90